# Altium PCB ISO.PcbDoc
Units mm, origin at the board's own origin, x right, y up, seen from the top; angles counter-clockwise.
Board outline 152.4 x 101.6 mm, 2 copper layers (Top Layer, Bottom Layer); 11 components, 148 nets, 28 pads, 3 vias.
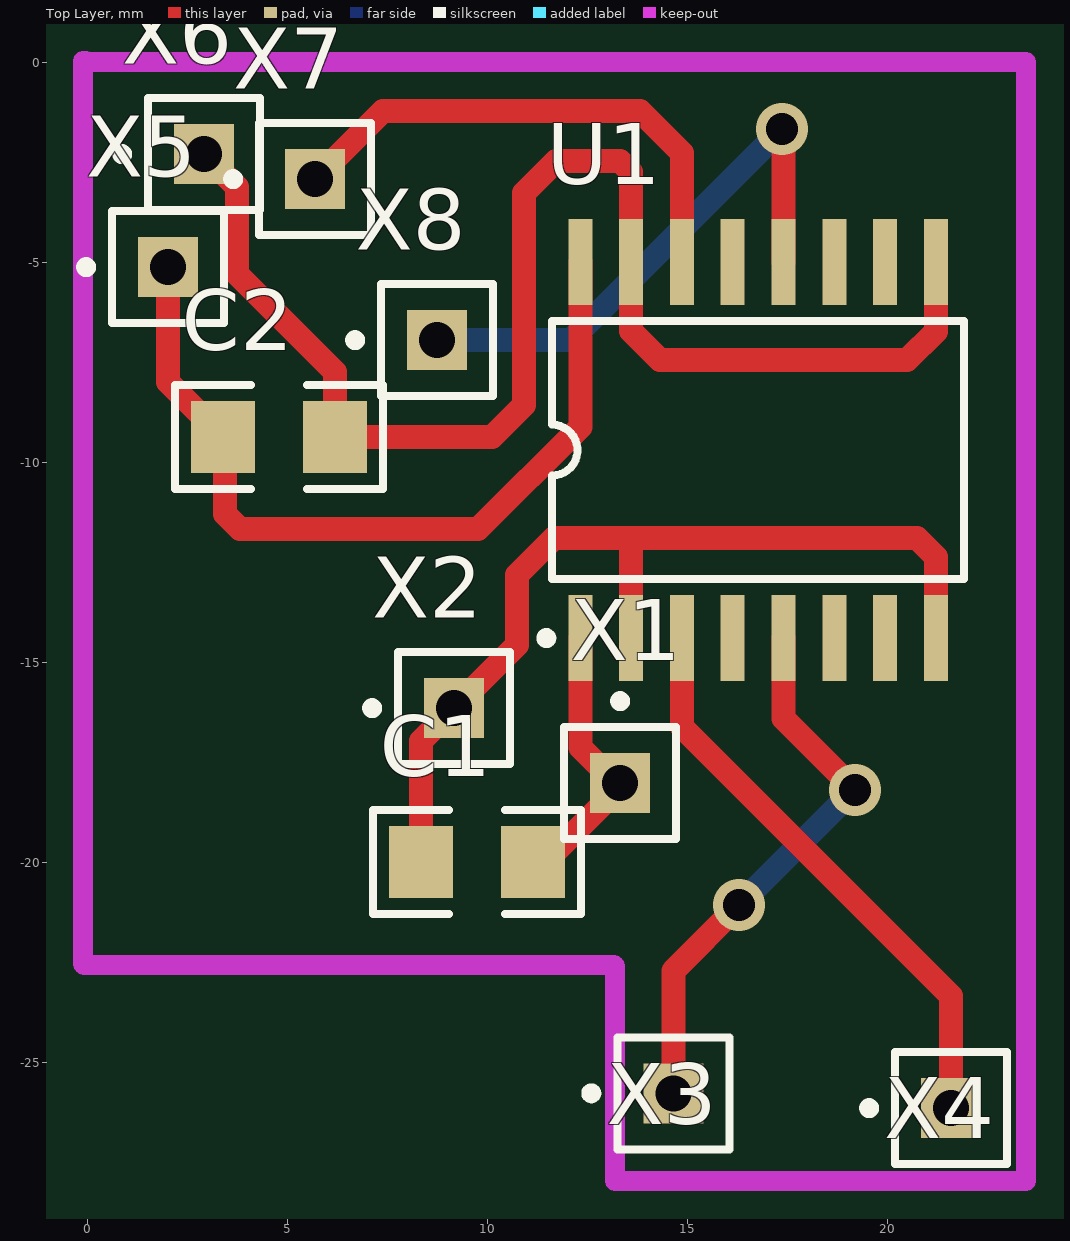
[diagram p0: Top Layer view]
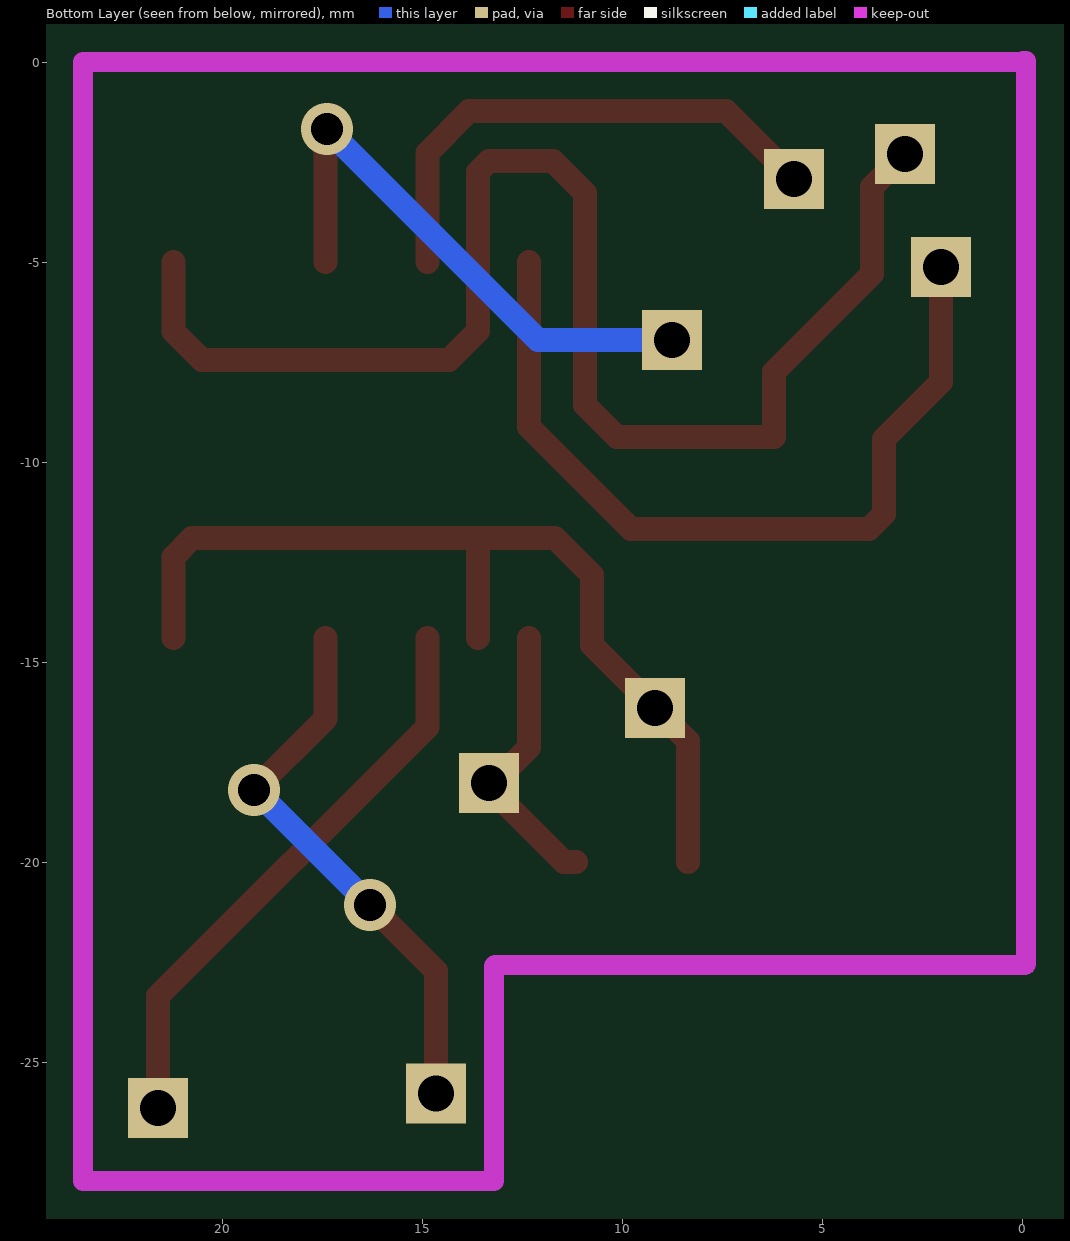
[diagram p1: Bottom Layer view, seen from below]

## Layer stack, top to bottom
Top Layer: signal copper 0.0356
Dielectric: dielectric 0.32, FR-4, Dk 4.8
Bottom Layer: signal copper 0.0356

## Board outline
-21.225,-69.575 131.175,-69.575 131.175,32.025 -21.225,32.025

## Design rules (kind name [scope] priority, off if disabled: settings)
Clearance POLY [InPoly] p1: gap=0.5
Clearance mega [InComponent(U1)] p2: gap=0.2
Clearance [All] p3: gap=0.3
ComponentClearance [All] p1: gap=0.01 collisioncheckmode=0
PolygonConnect [All] p1: connectstyle=Direct reliefconductorwidth=0.5 reliefentries=4 polygonreliefangle="90 Angle"
RoutingLayers [All] p1: top layer=Horizontal bottom layer=Vertical
RoutingVias [All] p1: holewidth=0.8 width=1.3 viastyle="Through Hole" minholewidth=0.6 minwidth=1.1 maxholewidth=0.85 maxwidth=1.5
SolderMaskExpansion [All] p1: expansion=0.102
TestPointUsage [All] p1: valid=0 allowmultiple=FALSE
Testpoint [All] p1: side=15 testpointundercomponent=TRUE minsize=1.016 maxsize=2.54 preferedsize=1.524 minholesize=0 maxholesize=1.016 preferedholesize=0.813 testpointgrid=0.025 style=1023 order=-539222988
Width [All] p1: maxlimit=2 minlimit=0.254 preferedwidth=0.254 toplayer_prefwidth=0.6 bottomlayer_prefwidth=0.6 minimp=50.000000 maximp=50.000000 favimp=50.000000
16 further rules are at their usual default settings.

## Components (designator, comment, footprint, x,y, rotation, side; value= is the part's Value field where it differs from the comment)
C1 "22mF" C3216-1206 9.75,-20 r0 top
C2 "22mF" C3216-1206 4.8,-9.375 r180 top
U1 "ISO7231" SO-G16/D10.3 16.775,-9.7 r0 top
X1 "" PIN1 13.325,-18.025 r0 top
X2 "" PIN1 9.175,-16.15 r90 top
X3 "" PIN1 14.654,-25.779 r90 top
X4 "" PIN1 21.6,-26.15 r90 top
X5 "" PIN1 2.025,-5.125 r90 top
X6 "" PIN1 2.925,-2.3 r90 top
X7 "" PIN1 5.7,-2.925 r90 top
X8 "" PIN1 8.75,-6.951 r90 top

## Footprints (in the part's own frame and the unit in brackets; to place one, negate y for a bottom-side part, rotate by r counter-clockwise, add the part's x,y. Pads: shape width x height; smd on the part's side, far side on the other; paste and mask are expansions set on the pad)
C3216-1206 [mm]
  rect 1.6x1.8 smd: 1(-1.4,0) 2(1.4,0)
  silkscreen extent -2.6,-1.3 2.6,1.3
PIN1 [mm]
  rect 1.5x1.5 hole 0.9: 1(0,0)
  silkscreen extent -1.4,-1.4 1.4,2.17
SO-G16/D10.3 [mm]
  rect 0.6x2.15 smd: 1(-4.445,-4.7) 2(-3.175,-4.7) 3(-1.905,-4.7) 4(-0.635,-4.7) 5(0.635,-4.7) 6(1.905,-4.7) 7(3.175,-4.7) 8(4.445,-4.7) 9(4.445,4.7) 10(3.175,4.7) 11(1.905,4.7) 12(0.635,4.7) 13(-0.635,4.7) 14(-1.905,4.7) 15(-3.175,4.7) 16(-4.445,4.7)
  silkscreen extent -5.42,-4.82 5.15,3.23

## Part data
C1 C2: library part "Cap Semi", "Capacitor (Semiconductor SIM Model)"
X1 X2 X3 X4 X5 X6 X7 X8: library part Socket, "Socket"

## Via types
v1: diameter 1.3, hole 0.8, Top Layer to Bottom Layer, 3 vias

## Nets (pads, with @x,y where several pads share a name; then routed paths per layer and width w, separated by ;. In a path a pad name is that pad's centre, name@x,y a point inside that pad or via, vN(x,y) a via of type N, cw(c..) or ccw(c..) an arc to the next point about the centre after c; other vN are vias at no path point)
+5V: 
+12V: 
AN0: 
AN1: 
AN2: 
AN3: 
BL0: 
BL1: 
C0: 
C1: 
C2: 
C3: 
C4: 
C5: 
C7: 
C8: 
CS: 
D2: 
D3: 
D4: 
D4: 
D4: 
D5: 
D6: 
D7: 
GND: 
ID0: 
ID0: 
ID1: 
ID2: 
IN0: 
IN1: 
IN2: 
IN3: 
IN4: 
IN5: 
LED0: 
LED1: 
MISO: 
MOSI: 
Net1_1: 
Net2_1: 
Net3_1: 
NetC1_1: C1.1 U1.2 U1.8 X2.1 | length 23.7
  Top Layer w0.6: C1.1 8.35,-16.975 10.75,-14.575 10.75,-12.825 11.675,-11.9 20.75,-11.9 21.22,-12.37 U1.8 ; U1.2 13.6,-11.9
NetC1_2: C1.2 U1.1 X1.1 | length 7.1
  Top Layer w0.6: C1.2 11.45,-20 13.325,-18.125 12.33,-17.13 U1.1
NetC2_1: C2.1 U1.9 U1.15 X6.1 | length 35.8
  Top Layer w0.6: X6.1 3.75,-3.125 3.75,-5.3 6.2,-7.75 C2.1 10.125,-9.375 10.925,-8.575 10.925,-3.275 11.725,-2.475 13.325,-2.475 13.6,-2.75 13.6,-6.725 14.325,-7.45 20.5,-7.45 21.22,-6.73 U1.9
NetC2_2: C2.2 U1.16 X5.1 | length 21
  Top Layer w0.6: X5.1 2.025,-8 3.45,-9.425 3.45,-11.3 3.825,-11.675 9.775,-11.675 12.33,-9.12 U1.16
NetC3_2: 
NetC3_2: 
NetC4_2: 
NetC4_2: 
NetC17_2: 
NetC21_2: 
NetC25_2: 
NetC26_2: 
NetD1_2: 
NetD2_1: 
NetD2_2: 
NetD3_2: 
NetD4_1: 
NetD4_8: 
NetD14_2: 
NetJ1_2: 
NetJ2_2: 
NetJmp1_2: 
NetJmp2_2: 
NetJP1_5: 
NetJP1_6: 
NetJP1_7: 
NetJP1_8: 
NetJP1_15: 
NetJP1_16: 
NetJP1_17: 
NetJP1_17: 
NetJP1_25: 
NetJP1_27: 
NetJP1_28: 
NetQ1_1: 
NetQ2_1: 
NetQ2_3: 
NetR14_1: 
NetR15_1: 
NetR24_1: 
NetR25_1: 
NetR25_2: 
NetR30_2: 
NetR31_2: 
NetR34_1: 
NetR35_1: 
NetR36_1: 
NetR41_2: 
NetR44_1: 
NetR50_2: 
NetU1_3: U1.3 X4.1 | length 14.5
  Top Layer w0.6: U1.3 14.87,-16.62 21.6,-23.35 X4.1
NetU1_5: U1.5 X3.1 | length 14
  Top Layer w0.6: X3.1 14.654,-22.721 v1(16.3,-21.075) ; U1.5 17.41,-16.41 v1(19.2,-18.2)
  Bottom Layer w0.6: v1(16.3,-21.075) 19.025,-18.35 19.05,-18.35 v1(19.2,-18.2)
NetU1_11: 
NetU1_12: U1.12 X8.1 | length 14.1
  Top Layer w0.6: v1(17.375,-1.675) 17.41,-1.71 U1.12
  Bottom Layer w0.6: X8.1 12.099,-6.951 v1(17.375,-1.675)
NetU1_14: U1.14 X7.1 | length 13
  Top Layer w0.6: X7.1 7.4,-1.225 13.825,-1.225 14.87,-2.27 U1.14
NetU1_30: 
NetU2_4: 
PA1: 
PA2: 
PA4: 
PA5: 
PB0: 
PB1: 
PB2: 
PB3: 
PB4: 
PB6: 
PB7: 
PC1: 
PC2: 
PC3: 
PC5: 
PC7: 
PD1: 
PE6: 
PG0: 
PG1: 
PWMI: 
PWMU: 
PWMU: 
PWMU: 
RES: 
RX: 
RX: 
RX: 
RX: 
RX: 
RX: 
RXD: 
RXD: 
SCK: 
TX: 
TX: 
TX: 
TX: 
TX: 
TX: 
TX: 
TX: 
TX: 
TX: 
TX: 
TX: 
TXS: 
UREF: 
pads on no net: U1.4 U1.6 U1.7 U1.10 U1.11 U1.13

## Keep-outs
Keep-Out Layer:
  lines w0.5: -0.1,0.025 -0.1,-22.55 -0.075,-22.575 13.175,-22.575 13.2,-22.6 13.2,-27.975 23.475,-27.975 23.475,0 0,0 -0.025,0.025

## Silkscreen, mask and mechanical layers (free items; w line width, h text height)
Mechanical 1:
  lines w0.5: -0.125,-22.575 13.175,-22.575 ; -0.075,-22.575 -0.075,0.025 -0.025,-0.025 23.5,-0.025 23.5,-27.975 13.225,-27.975 ; 13.2,-27.975 13.2,-22.575